# Altium PCB Grabber_DIOT.PCBDOC (part 2 of 7)
Units mm, origin at the board's own origin, x right, y up, seen from the top; angles counter-clockwise.
Board outline 222.9 x 100 mm, 4 copper layers (L1, P2, P3, L4), stack 1.6 mm thick; 235 components, 180 nets, 1032 pads, 664 vias.
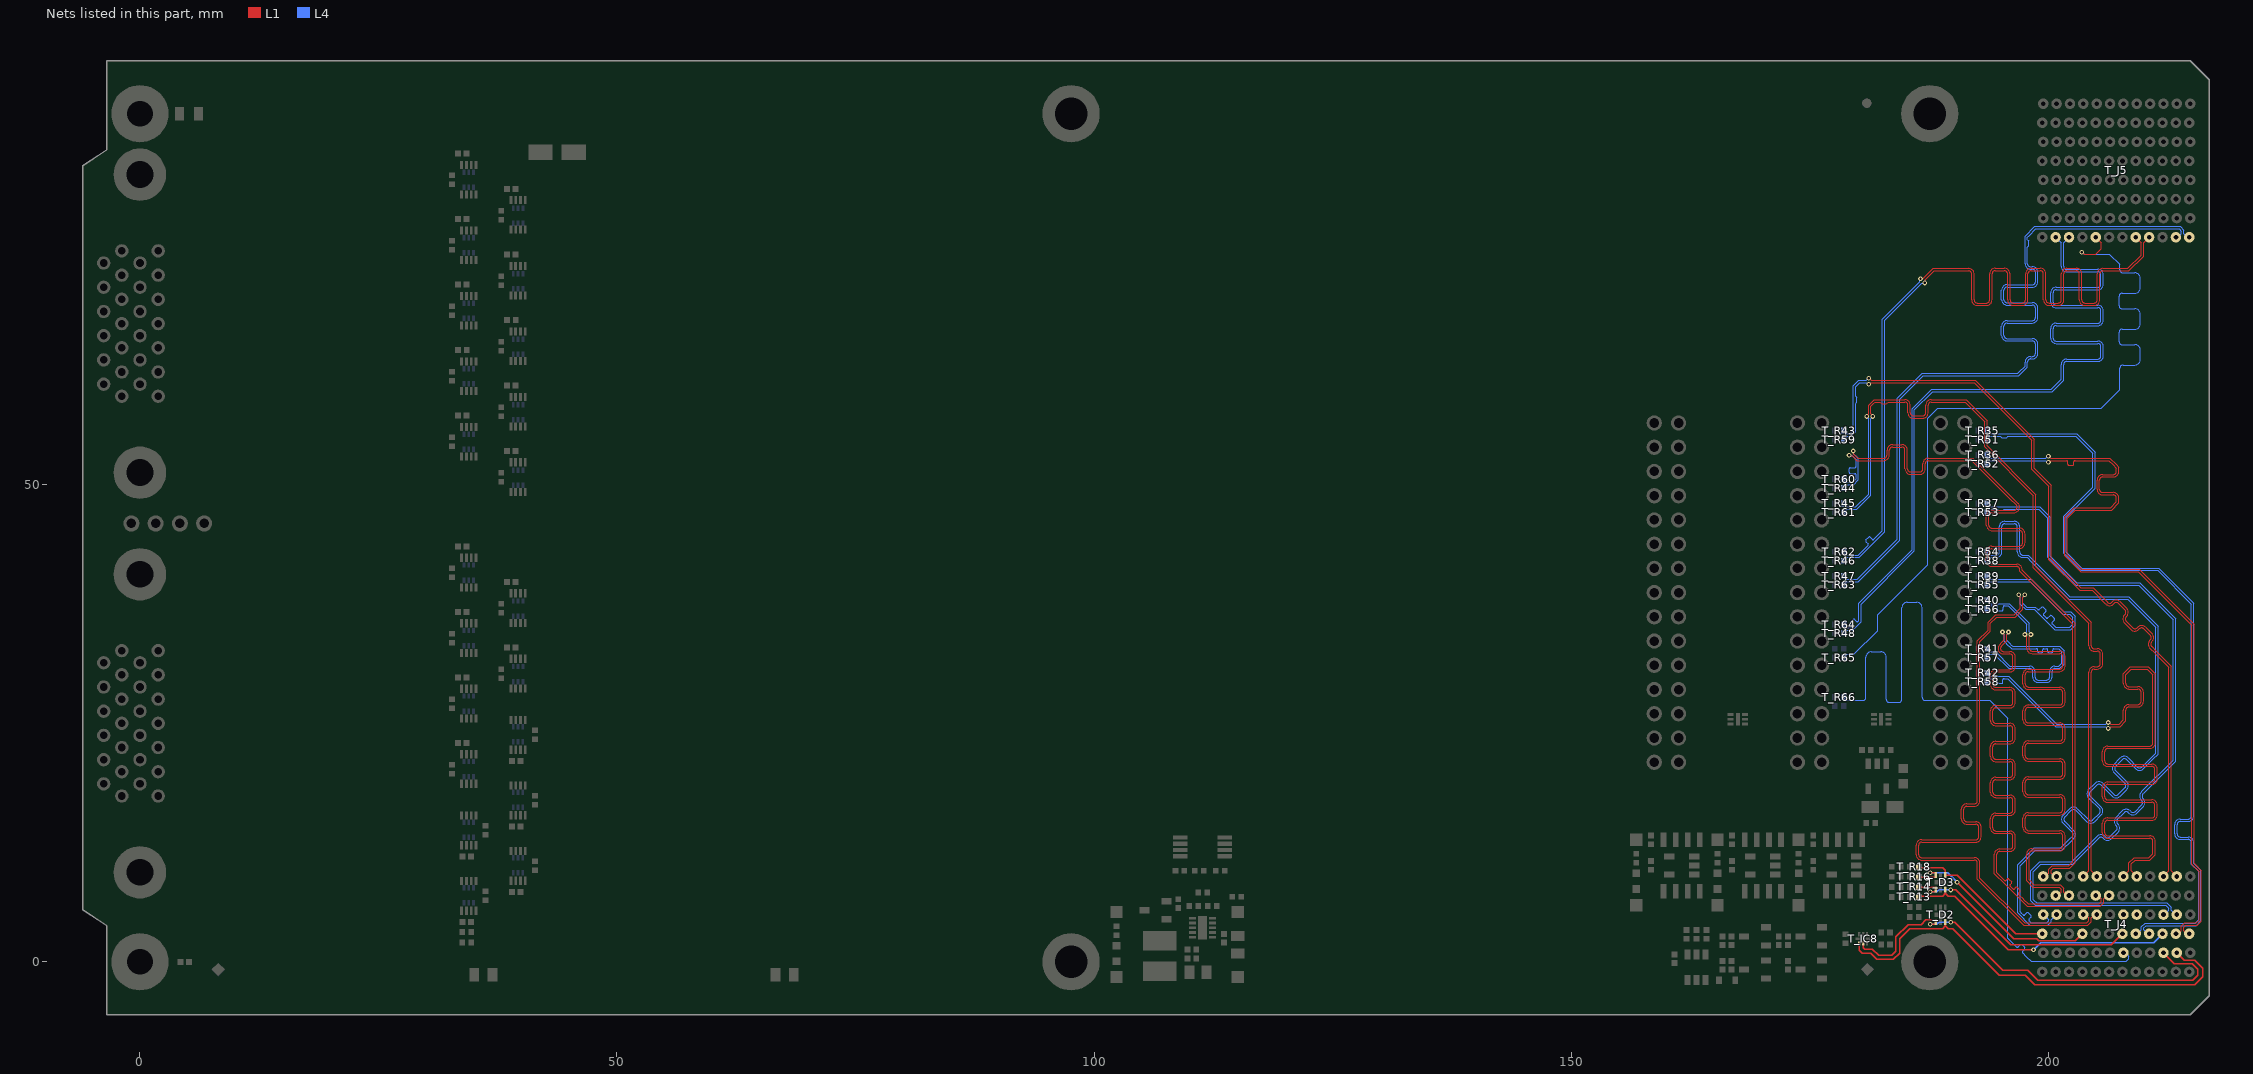
[diagram p4: the nets of this part, all layers, seen from the top]

## Part data
C47A C47B C47C C47D C47E C47F C47G C47H C47I C47J C47K C47L C47M C47N C47O C47P C47Q C47R C47S C47T C47U C59 C65 C67 T_C3 T_C4 T_C5 T_C6 T_C7 T_C8 T_C9 T_C14 T_C15 T_C20 T_C21 T_C22 T_C23: library part CC0402_100NF_50V_10%_X7R, "Non-polarised capacitor", Case=0402, Manufacturer=GENERIC, Manufacturer1 ComponentHeight=0.55mm, Manufacturer1 Example=MURATA, Manufacturer1 Part Number=GRM155R71H104KE14D, Tolerance=±10%, Voltage=50V, Author="CERN DEM MR", Component Type=Standard, CreateDate=30.06.2017, HelpURL=\\cern.ch\dfs\Applications\Altium\Datasheets\CC0402_MURATA_GRM155R71H104KE14D.pdf, LatestRevisionDate=30.06.2017, Manufacturer Part Number=CC0402_100NF_50V_10%_X7R, Mounted=Yes, Part Description="SMD Multilayer Chip Ceramic Capacitor", Part Number=CC0402_100NF_50V_10%_X7R, Pin Count=2, Sense=No, SMD=Yes, Socket=No, Status=None, TC=X7R
C62: library part CAE430-540_10UF_16V_20%, "Polarised capacitor", Case=B, Manufacturer=PANASONIC, Manufacturer Part Number=EEEFK1C100AR, Tolerance=±20%, Voltage=16V, Author="CERN DEM JLC", ComponentHeight=5.8mm, Component Type=Standard, CreateDate=03.12.2007, HelpURL=\\cern.ch\dfs\Applications\Altium\Datasheets\CAE_PANASONIC_FK.pdf, LatestRevisionDate=05.11.2014, Mounted=Yes, Part Description="Aluminum Electrolytic SMT Capacitor", Part Number=CAE430-540_10UF_16V_20%, Pin Count=2, Sense=No, SMD=Yes, Socket=No, Status="Not Recommended"
C66 C68: library part CC0805_22UF_16V_10%_X5R, "Non-polarised capacitor", Case=0805, Manufacturer=GENERIC, Manufacturer1 ComponentHeight=1.35mm, Manufacturer1 Example=TDK, Manufacturer1 Part Number=C2012X5R1C226KT, Tolerance=±10%, Voltage=16V, Author="CERN DEM JLC", Component Type=Standard, CreateDate=25.10.2012, HelpURL=\\cern.ch\dfs\Applications\Altium\Datasheets\CC0805_X5R_TDK_C.pdf, LatestRevisionDate=25.10.2012, Manufacturer Part Number=CC0805_22UF_16V_10%_X5R, Mounted=Yes, Part Description="SMD Multilayer Chip Ceramic Capacitor", Part Number=CC0805_22UF_16V_10%_X5R, Pin Count=2, Sense=No, SMD=Yes, Socket=No, Status=Preferred, TC=X5R
D1A D1B D1C D1D D1E D1F D1G D1H D1I D1J D1K D1L D1M D1N D1O D1P D1Q D1R D1S D1T D1U: "ESD Protection Diodes Array (8kV) with Low Clamping Voltage", Manufacturer="ON SEMICONDUCTOR", Voltage=5.5V, Author="CERN DEM JLC", Bonding=No, ComponentHeight=1.75mm, Component Type=Standard, CreateDate=05.12.2012, Device=NUP4114UPXV6T1G, HelpURL=\\cern.ch\dfs\Applications\Altium\Datasheets\NUP4114UPXV6T1G.pdf, LatestRevisionDate=05.12.2012, Manufacturer Part Number=NUP4114UPXV6T1G, Mounted=Yes, PackageDescription="SOTFL (SOT666, SOT563,), 0.50mm, Pitch; 6 Pin, 1.20mm W X 1.60mm L X 0.60mm H Body, IPC Medium Density", Part Description="ESD Protection Diodes Array (8kV) with Low Clamping Voltage", Part Number=NUP4114UPXV6T1G, Pin Count=8, PressFit=No, Sense=No, SMD=Yes, Socket=No
FTG1 FTG4: library part FIDUCIAL_TARGET_C100-200, "Fiducial Target", Author="CERN DEM JLC", Component Type="Standard (No BOM)", ComponentHeight=0mm, CreateDate=09.02.2010, Family=Fiducial, HelpURL=Undefined, LatestRevisionDate=04.04.2012, Mounted=No, PackageDescription="Round Fiducial Target, Top Layer, 1.0mm, Top Solder 2.0mm, Keepout =2.0mm", Part Description="Round Fiducial Target, Top Layer, 1.0mm, Top Solder 2.0mm, Keepout =2.0mm", Part Number=FIDUCIAL_TARGET_C100-200, Pin Count=1, Sense=No, SMD=Yes, Socket=No, Status=None
FTG2 FTG3 FTG5 FTG6: library part FIDUCIAL_TARGET_S100-200, "Fiducial Target", Author="CERN DEM JLC", Component Type="Standard (No BOM)", ComponentHeight=0mm, CreateDate=09.02.2010, Family=Fiducial, HelpURL=Undefined, LatestRevisionDate=04.04.2012, Mounted=No, PackageDescription="Square Fiducial Target, Top Layer, 1.0mm, Top Solder 2.0mm, Keepout =2.0mm", Part Description="Square Fiducial Target, Top Layer, 1.0mm, Top Solder 2.0mm, Keepout =2.0mm", Part Number=FIDUCIAL_TARGET_S100-200, Pin Count=1, Sense=No, SMD=Yes, Socket=No, Status=None
IC20A IC20B IC20C IC20D IC20E IC20F IC20G IC20H IC20I IC20J IC20K IC20L IC20M IC20N IC20O IC20P IC20Q IC20R IC20S IC20T IC20U: "LVDS Single Port High Speed Repeater", Case=TSSOP8, Manufacturer="FAIRCHILD SEMICONDUCTOR", Author="CERN DEM JLC", Bonding=No, ComponentHeight=0.8mm, Component Type=Standard, CreateDate=08.11.2016, Device=FIN1101K8X, HelpURL=\\cern.ch\dfs\Applications\Altium\Datasheets\FIN1101K8X.pdf, LatestRevisionDate=08.11.2016, Manufacturer Part Number=FIN1101K8X, Mounted=Yes, PackageDescription="SOP, 0.50mm Pitch; 8 pin, 2.30mm W X 2.00mm L X 0.90mm H body, PC Medium Density", Part Description="LVDS Single Port High Speed Repeater", Part Number=FIN1101K8X, Pin Count=8, PressFit=No, Sense=No, SMD=Yes, Socket=No
IC27: "4.75-28VDC to 1-6VDC, 500mA Step-Down Converter With Sleep Mode", Case=SON10, Manufacturer="TEXAS INSTRUMENTS", Author="CERN DEM JMW", Bonding=No, ComponentHeight=0.8mm, Component Type=Standard, CreateDate=11.08.2015, Device=TPS62175DQC, HelpURL=\\cern.ch\dfs\Applications\Altium\Datasheets\TPS62175DQC.pdf, LatestRevisionDate=11.08.2015, Manufacturer Part Number=TPS62175DQC, Mounted=Yes, PackageDescription="SON, 10-Leads, Body 2x3mm, Pitch 0.5mm, Thermal Pad 0.94x2.5mm, IPC Medium Density", Part Description="4.75-28VDC to 1-6VDC, 500mA Step-Down Converter With Sleep Mode", Part Number=TPS62175DQC, Pin Count=11, PressFit=No, Sense=No, SMD=Yes, Socket=No
J1 J2: library part 3M_N10226-5212PC, "Connector Mini D Ribbon (MDR) 26 Female", Manufacturer=3M, Author="CERN DEM JLC", Component Type=Standard, ComponentHeight=9.4mm, CreateDate=18.11.2008, Family="MDR 26", HelpURL=\\cern.ch\dfs\Applications\Altium\Datasheets\3M_N10226-5212PC.pdf, LatestRevisionDate=14.10.2009, Manufacturer Part Number=N10226-5212PC, Mounted=Yes, Part Description="26 contacts, Mini D Ribbon (MDR), .050\" Boardmount Through-hole Right Angle Receptacle-Shielded, Diecast Body, 102 Series", Part Number=N10226-5212PC, Pin Count=28, PressFit=No, Sense=No, SMD=No, Socket=No, Status=None
L2: library part IND_10UH_10%_MURATA-PS_8400, "Inductor With Core", Manufacturer="MURATA POWER SOLUTIONS", Manufacturer Part Number=84103C, Power=950mA, Resistance=0.24R, Tolerance=±10%, Author="CERN DEM JLC", ComponentHeight=2.9mm, Component Type=Standard, CreateDate=02.07.2012, HelpURL=\\cern.ch\dfs\Applications\Altium\Datasheets\IND_MURATA-PS_8400.pdf, LatestRevisionDate=02.07.2012, Mounted=Yes, Part Description="Miniature Surface Mount Power Inductor (8400 Serie)", Part Number=IND_10UH_10%_MURATA-PS_8400, Pin Count=2, Sense=No, SMD=Yes, Socket=No, Status=None
R1 T_R3 T_R7 T_R8 T_R31 T_R32 T_R33 T_R34: library part R0402_10K_1%_0.0625W_100PPM, "Resistor - 1%", Case=0402, Manufacturer=GENERIC, Manufacturer1 ComponentHeight=0.4mm, Manufacturer1 Example="YAGEO PHYCOMP", Manufacturer1 Part Number=232270671003L, Power=0.0625W, Tolerance=±1%, Author="CERN DEM JLC", Component Type=Standard, CreateDate=03.12.2007, HelpURL=\\cern.ch\dfs\Applications\Altium\Datasheets\R0402_Phycomp_RC0402.pdf, LatestRevisionDate=17.10.2012, Manufacturer Part Number=R0402_10K_1%_0.0625W_100PPM, Mounted=Yes, Part Description="General Purpose Thick Film Chip Resistor", Part Number=R0402_10K_1%_0.0625W_100PPM, Pin Count=2, PressFit=No, Sense=No, SMD=Yes, Socket=No, Status="Not Recommended", TC=±100ppm/°C
R8 R9 R131A R131B R131C R131D R131E R131F R131G R131H R131I R131J R131K R131L R131M R131N R131O R131P R131Q R131R R131S R131T R131U: library part R0402_100R_1%_0.1W_100PPM, "Resistor - 1%", Case=0402, Manufacturer=GENERIC, Manufacturer1 ComponentHeight=0.4mm, Manufacturer1 Example=PANASONIC, Manufacturer1 Part Number=ERJ2RKF1000X, Manufacturer Part Number=R0402_100R_1%_0.1W_100PPM_50V, Power=0.1W, Tolerance=±1%, Voltage=50V, Author="CERN DEM JLC", Component Type=Standard, CreateDate=12.12.2013, HelpURL=\\cern.ch\dfs\Applications\Altium\Datasheets\R0402_PANASONIC_ERJ2RK.pdf, LatestRevisionDate=03.03.2015, Mounted=Yes, Part Description="General Purpose Thick Film Chip Resistor", Part Number=R0402_100R_1%_0.1W_100PPM, Pin Count=2, Sense=No, SMD=Yes, Socket=No, Status="Not recommended", TC=±100ppm/°C
R121: library part R0402_75K_1%_0.0625W_100PPM, "Resistor - 1%", Case=0402, Manufacturer=GENERIC, Manufacturer1 ComponentHeight=0.4mm, Manufacturer1 Example="YAGEO PHYCOMP", Manufacturer1 Part Number=232270677503L, Power=0.0625W, Tolerance=±1%, Author="CERN DEM JLC", Component Type=Standard, CreateDate=03/12/2007, HelpURL=\\cern.ch\dfs\Applications\Altium\Datasheets\R0402_Phycomp_RC0402.pdf, LatestRevisionDate=17/10/2012, Manufacturer Part Number=R0402_75K_1%_0.0625W_100PPM, Mounted=Yes, Part Description="General Purpose Thick Film Chip Resistor", Part Number=R0402_75K_1%_0.0625W_100PPM, Pin Count=2, PressFit=No, Sense=No, SMD=Yes, Socket=No, Status="Not Recommended", TC=±100ppm/°C
R122: library part R0402_24K_1%_0.0625W_100PPM, "Resistor - 1%", Case=0402, Manufacturer=GENERIC, Manufacturer1 ComponentHeight=0.4mm, Manufacturer1 Example="YAGEO PHYCOMP", Manufacturer1 Part Number=232270672403L, Power=0.0625W, Tolerance=±1%, Author="CERN DEM JLC", Component Type=Standard, CreateDate=03/12/2007, HelpURL=\\cern.ch\dfs\Applications\Altium\Datasheets\R0402_Phycomp_RC0402.pdf, LatestRevisionDate=17/10/2012, Manufacturer Part Number=R0402_24K_1%_0.0625W_100PPM, Mounted=Yes, Part Description="General Purpose Thick Film Chip Resistor", Part Number=R0402_24K_1%_0.0625W_100PPM, Pin Count=2, PressFit=No, Sense=No, SMD=Yes, Socket=No, Status="Not Recommended", TC=±100ppm/°C
SCREW1 SCREW2 SCREW3 SCREW4: library part MECH_MDR_screw_lock, "VHDCI Female Screw Lock", Manufacturer=3M, Author=GK, Component Type=Mechanical, ComponentHeight=5.48mm, CreateDate=10.09.2013, HelpURL=\\cern.ch\dfs\Applications\Altium\Datasheets\TYCO_749087-2.pdf, LatestRevisionDate=10.09.2013, Manufacturer Part Number=3341-31, Mounted=Yes, PackageDescription="MDR Female Screw Locks, Thread Size: M2.5", Part Description="MDR Female Screw Locks, Thread Size: M2.5", Part Number=3341-31, Pin Count=0, PressFit=No, Sense=No, SMD=No, Socket=No, Status=None
T_B7 T_B8: library part PLATED_HOLE2.7_PAD6.0, "Single Terminal Socket", Author="CERN DEM HF", Component Type="Standard (No BOM)", ComponentHeight=0mm, CreateDate=28.08.2024, Family="Plated Hole", HelpURL=Undefined, LatestRevisionDate=28.08.2024, Mounted=No, PackageDescription="Plated Through Hole: Hole Dia.=2.7mm Pad Dia.=6.0mm", Part Description="Plated Through Hole: Hole Dia.=2.7mm Pad Dia.=6.0mm", Part Number=PLATED_HOLE2.7_PAD6.0, Pin Count=1, Sense=No, SMD=No, Socket=No, Status=None
T_C1: library part CC0603_1UF_25V_10%_X7R, "Non-polarised capacitor", Case=0603, Manufacturer=GENERIC, Manufacturer1 ComponentHeight=0.9mm, Manufacturer1 Example=MURATA, Manufacturer1 Part Number=GRM188R71E105KA12D, Tolerance=±10%, Voltage=25V, Author="CERN DEM JLC", Component Type=Standard, CreateDate=18.01.2011, HelpURL=\\cern.ch\dfs\Applications\Altium\Datasheets\CC0603_X7R_MURATA.pdf, LatestRevisionDate=18.01.2011, Manufacturer Part Number=CC0603_1UF_25V_10%_X7R, Mounted=Yes, Part Description="SMD Multilayer Chip Ceramic Capacitor", Part Number=CC0603_1UF_25V_10%_X7R, Pin Count=2, Sense=No, SMD=Yes, Socket=No, Status=None, TC=X7R
T_C2: library part CTE3216-18_4.7UF_10V_10%_AVX_TPSA475K010T1400, "Polarised capacitor", Case=A, Manufacturer=AVX, Manufacturer Part Number=TPSA475K010T1400, Tolerance=±10%, Voltage=10V, Author="CERN DEM JLC", Component Type=Standard, ComponentHeight=1.8mm, CreateDate=23.01.2018, HelpURL=\\cern.ch\dfs\Applications\Altium\Datasheets\CTE-LESR_AVX_TPS-AUTO.pdf, LatestRevisionDate=23.01.2018, Mounted=Yes, Part Description="Low ESR 1R4 Automotive Solid Tantalum Chip Capacitor", Part Number=CTE3216-18_4.7UF_10V_10%_AVX_TPSA475K010T1400, Pin Count=2, Sense=No, SMD=Yes, Socket=No, Status=Preferred
T_C12: library part CC0402_22PF_50V_5%_C0G, "Non-polarised capacitor", Case=0402, Manufacturer=GENERIC, Manufacturer1 ComponentHeight=0.55mm, Manufacturer1 Example=KEMET, Manufacturer1 Part Number=C0402C220J5GACTU, Tolerance=±5%, Voltage=50V, Author="CERN DEM JLC", Component Type=Standard, CreateDate=2007-12-03, HelpURL="\\cern.ch\dfs\Applications\Altium\Datasheets\CC0402_C0G_KEMET_(Commercial Grade).pdf", LatestRevisionDate=2007-12-03, Manufacturer Part Number=CC0402_22PF_50V_5%_C0G, Mounted=Yes, Part Description="SMD Multilayer Chip Ceramic Capacitor", Part Number=CC0402_22PF_50V_5%_C0G, Pin Count=2, Sense=No, SMD=Yes, Socket=No, Status=Preferred, TC=C0G/NP0
T_C13 T_C16 T_C17 T_C18 T_C19: library part CC0402_10NF_50V_5%_X7R, "Non-polarised capacitor", Case=0402, Manufacturer=GENERIC, Manufacturer1 ComponentHeight=0.55mm, Manufacturer1 Example=KEMET, Manufacturer1 Part Number=C0402C103J5RAC, Tolerance=±5%, Voltage=50V, Author="CERN DEM BC", Component Type=Standard, CreateDate=15.07.2020, HelpURL=\\cern.ch\dfs\Applications\Altium\Datasheets\CC0402_X7R_KEMET.pdf, LatestRevisionDate=15.07.2020, Manufacturer Part Number=CC0402_10NF_50V_5%_X7R, Mounted=Yes, Part Description="SMD Multilayer Chip Ceramic Capacitor", Part Number=CC0402_10NF_50V_5%_X7R, Pin Count=2, Sense=No, SMD=Yes, Socket=No, Status=Preferred, TC=X7R
T_D1 T_D2 T_D3 T_D4: library part CMP-004-00037-2, "Diode TVS Quint Common Anode Uni-Dir 3.3V 40W 6-Pin SLP EP T/R", Max Operating Temperature=125°C, Min Operating Temperature=-55°C, Mounting Technology="Surface Mount", Pins=6
T_D6: "Schottky Diode", Case=SOD-523F, Manufacturer=COMCHIP, Power=500mA, Voltage=20V, Author="CERN DEM HF", Bonding=No, Component Type=Standard, ComponentHeight=1mm, CreateDate=13.10.2023, Device=CDBU0520-HF, HelpURL=\\cern.ch\dfs\Applications\Altium\Datasheets\CDBU0520-HF.pdf, LatestRevisionDate=13.10.2023, Manufacturer Part Number=CDBU0520-HF, Mounted=Yes, PackageDescription="Small Outline Diode Flat Lead (SOD-523F), Body; 1.80mm L X 1mm W X 0.85mm H", Part Description="20V Surface mount Schottky Barrier Diode", Part Number=CDBU0520-HF, Pin Count=2, PressFit=No, Sense=No, SMD=Yes, Socket=No
T_IC1: "500mA Peak Output LDO Regulator", Case=SOT23-5, Manufacturer="MICROCHIP TECHNOLOGY", Author="CERN DEM WB", Bonding=No, Component Type=Standard, ComponentHeight=1.45mm, CreateDate=2019-04-16, Device=MIC5219-3.3YM5, HelpURL=\\cern.ch\dfs\Applications\Altium\Datasheets\MIC5219-3.3YM5.pdf, LatestRevisionDate=2019-04-16, Manufacturer Part Number=MIC5219-3.3YM5, Mounted=Yes, PackageDescription="SOT, 0.95mm pitch; 5 pin, 1.60mm W X 2.90mm L X 1.45mm H body, IPC Medium Density", Part Description="3.3V 500mA Peak Output Low Drop-Out  (LDO) Regulator", Part Number=MIC5219-3.3YM5, Pin Count=5, PressFit=No, Sense=No, SMD=Yes, Socket=No
T_IC2 T_IC4 T_IC9: "1.7V-5.5V, 2K I2C Serial EEPROM With EUI-48 Node Identity", Case=SOT23-5, Manufacturer="MICROCHIP TECHNOLOGY", Author="CERN DEM MR", Bonding=No, Component Type=Standard, ComponentHeight=1.45mm, CreateDate=31.03.2016, Device=24AA02E48T-I/OT, HelpURL=\\cern.ch\dfs\Applications\Altium\Datasheets\24AA02E48T-I-OT.pdf, LatestRevisionDate=31.03.2016, Manufacturer Part Number=24AA02E48T-I/OT, Mounted=Yes, PackageDescription="SOT, 0.95mm pitch; 5 pin, 1.60mm W X 2.90mm L X 1.45mm H body, IPC Medium Density", Part Description="1.7V-5.5V, 2K I2C Serial EEPROM with EUI-48 Node Identity", Part Number=24AA02E48T-I/OT, Pin Count=5, PressFit=No, Sense=No, SMD=Yes, Socket=No
T_IC3 T_IC5 T_IC10: "1.7V-5.5V, 2K I2C™ Serial EEPROMs with EUI-48™ Node Identity", Case=SOIC8, Manufacturer="MICROCHIP TECHNOLOGY", Author="CERN DEM MR", Bonding=No, Component Type=Standard, ComponentHeight=1.75mm, CreateDate=19.07.2016, Device=24AA025E48-I/SN, HelpURL=\\cern.ch\dfs\Applications\Altium\Datasheets\24AA025E48-I-SN.pdf, LatestRevisionDate=19.07.2016, Manufacturer Part Number=24AA025E48-I/SN, Mounted=Yes, PackageDescription="SOIC 8, Pitch 1.27mm - Body 4x5mm, IPC Medium Density", Part Description="1.7V-5.5V, 2K I2C™ Serial EEPROMs with EUI-48™ Node Identity", Part Number=24AA025E48-I/SN, Pin Count=8, PressFit=No, Sense=No, SMD=Yes, Socket=No
T_IC6: library part CMP-010-00652-2, "Serial Switch/Digital Sensor, 9 Bit(s), 3Cel, Square, 8 Pin, Surface Mount", Max Operating Temperature=125°C, Max Supply Voltage=5.5V, Min Operating Temperature=-55°C, Min Supply Voltage=2.7V, Mounting Technology="Surface Mount", Pins=8, RoHS Compliant=Yes, Sensor Type="TEMPERATURE SENSOR,SWITCH/DIGITAL OUTPUT,SERIAL"
T_IC7: "Low Quiescent Current, Programmable-Delay Supervisory Circuit", Case=SOT23-6, Manufacturer="TEXAS INSTRUMENTS", Manufacturer Part Number=TPS3808G01DBV, Author="CERN DEM JLC", Bonding=No, Component Type=Standard, ComponentHeight=1.45mm, CreateDate=22.10.2008, Device=TPS3808G01DBVT, HelpURL=\\cern.ch\dfs\Applications\Altium\Datasheets\TPS3808G01DBVT.pdf, LatestRevisionDate=10.06.2022, Mounted=Yes, PackageDescription="SOT, 0.95mm Pitch; 6 Pin, 1.60mm W X 2.90mm L X 1.45mm H body, IPC Medium Density", Part Description="Adjustable Low Quiescent Current, Programmable-Delay Supervisory Circuit", Part Number=TPS3808G01DBVT, Pin Count=6, PressFit=No, Sense=No, SMD=Yes, Socket=No
T_IC8: library part CMP-015-00014-1, "Dual Supply 2-Bit Voltage Translator/Buffer/Repeater Isolator for I2C Applications", Manufacturer=Onsemi, Max Operating Temperature=85°C, Max Supply Voltage=5.5V, Min Operating Temperature=-40°C, Min Supply Voltage=1.65V, Manufacaturer Part Number=FXMA2102UMX, Mounting Technology="Surface Mount", Pins=8
T_J1 T_J2 T_J3: library part 3M_N2530-6002RB, "Connector 30 Male", Manufacturer=3M, Manufacturer Part Number=N2530-6002RB, Author="CERN DEM JLC", ComponentHeight=10.03mm, Component Type=Standard, CreateDate=11.02.2009, Family="Header 30", HelpURL=\\cern.ch\dfs\Applications\Altium\Datasheets\3M_N2530-6002RB.pdf, LatestRevisionDate=11.08.2009, Mounted=Yes, Part Description="30 Contacts - Straight .100'' x .100'' Low Profile Four-Wall Header, 2500 Series", Part Number=3M_N2530-6002RB, Pin Count=30, PressFit=No, Sense=No, SMD=No, Socket=No, Status=None
T_J4: library part AMPHENOL_10052825-101LF, "72 Contacts Header, 6 Columns, 4 Pairs per Column", Manufacturer=AMPHENOL, Manufacturer Part Number=10052825-101LF, Author="CERN DEM MR", ClassName=Overlapping, Component Type=Standard, ComponentHeight=15.35mm, ComponentLink1Description=Application, ComponentLink1URL=\\cern.ch\dfs\Applications\Altium\Datasheets\AMPHENOL_10052825-101LF_Application.pdf, CreateDate=19/02/2018, Family="AirMax VS", HelpURL=\\cern.ch\dfs\Applications\Altium\Datasheets\AMPHENOL_10052825-101LF.pdf, LatestRevisionDate=19/02/2018, Mounted=Yes, Part Description="72 Contacts, 2mm Pitch, 6 Columns, 4 Pairs per Column, 4 Walls, Right Angle Header", Part Number=AMPHENOL_10052825-101LF, Pin Count=72, PressFit=Yes, Sense=No, SMD=No, Socket=No, Status=None
T_J5: library part AMPHENOL_10052838-101LF, "96 Contacts Header, 8 Columns, 4 Pairs per Column", Manufacturer=AMPHENOL, Manufacturer Part Number=10052838-101LF, Author="CERN DEM MR", Component Type=Standard, ComponentHeight=15.35mm, ComponentLink1Description=Application, ComponentLink1URL=\\cern.ch\dfs\Applications\Altium\Datasheets\AMPHENOL_10052838-101LF_Application.pdf, CreateDate=19.02.2018, Family="AirMax VS", HelpURL=\\cern.ch\dfs\Applications\Altium\Datasheets\AMPHENOL_10052838-101LF.pdf, LatestRevisionDate=19.02.2018, Mounted=Yes, Part Description="96 Contacts, 2mm Pitch, 8 Columns, 4 Pairs per Column, 4 Walls, Right Angle Header", Part Number=AMPHENOL_10052838-101LF, Pin Count=96, PressFit=Yes, Sense=No, SMD=No, Socket=No, Status=None
T_LD1: library part LED_DIALIGHT_571-0112F, "2x LED  Botom Green, Top Red", Manufacturer=DIALIGHT, Manufacturer Part Number=571-0112F, Author="CERN DEM JLC", Bonding=No, Color=Red/Green, ComponentHeight=8.6mm, Component Type=Standard, CreateDate=09.11.2009, HelpURL=\\cern.ch\dfs\Applications\Altium\Datasheets\LED_DIALIGHT_571-0112F.pdf, LatestRevisionDate=17.03.2010, Mounted=Yes, PackageDescription="2x 2mm LED (Top: Red, Bot: Green) PCB Edge Mounting (Without positioning pins) DIALIGHT 571 Serie", Part Description="Dual 2mm  LEDs, Red Top,Green Bot, CBI® Circuit Board Indicator (Without positioning pins)", Part Number=LED_DIALIGHT_571-0112F, Pin Count=4, PressFit=No, Sense=No, SMD=No, Socket=No
T_LD3 T_LD4 T_LD5 T_LD6: library part LED_KINGBRIGHT_KPH-1608CGCK, "LED Green 1C 2A", Manufacturer=KINGBRIGHT, Manufacturer Part Number=KPH-1608CGCK, Author="CERN DEM JLC", Bonding=No, Color=Green, Component Type=Standard, ComponentHeight=0.65mm, CreateDate=03.07.2017, HelpURL=\\cern.ch\dfs\Applications\Altium\Datasheets\LED_KINGBRIGHT_KPH-1608CGCK.pdf, LatestRevisionDate=03.07.2017, Mounted=Yes, PackageDescription="SMT Green LED, Case 0603, Body L 1.6 x W 0.8mm H 0.65mm", Part Description="SMD Green LED, Case 1.6mmX0.8mm(0603), 0.65mm Thickness", Part Number=LED_KINGBRIGHT_KPH-1608CGCK, Pin Count=2, PressFit=No, Sense=No, SMD=Yes, Socket=No
T_M1 T_M2 T_M3 T_M4: library part CMP-00028-00019-2, "PTH  Hole 3.4, 6mm pad", Pins=1
T_R1 T_R5 T_R6 T_R9 T_R10: library part R0402_1K6_1%_0.0625W_100PPM, "Resistor - 1%", Case=0402, Manufacturer=GENERIC, Manufacturer1 ComponentHeight=0.4mm, Manufacturer1 Example="YAGEO PHYCOMP", Manufacturer1 Part Number=232270671602L, Power=0.0625W, Tolerance=±1%, Author="CERN DEM JLC", Component Type=Standard, CreateDate=03.12.2007, HelpURL=\\cern.ch\dfs\Applications\Altium\Datasheets\R0402_Phycomp_RC0402.pdf, LatestRevisionDate=17.10.2012, Manufacturer Part Number=R0402_1K6_1%_0.0625W_100PPM, Mounted=Yes, Part Description="General Purpose Thick Film Chip Resistor", Part Number=R0402_1K6_1%_0.0625W_100PPM, Pin Count=2, PressFit=No, Sense=No, SMD=Yes, Socket=No, Status="Not Recommended", TC=±100ppm/°C
T_R2 T_R4 T_R25 T_R35 T_R36 T_R37 T_R38 T_R39 T_R40 T_R41 T_R42 T_R43 T_R44 T_R45 T_R46 T_R47 T_R48 T_R49 T_R50 T_R51 T_R52 T_R53 T_R54 T_R55 T_R56 T_R57 T_R58 T_R59 T_R60 T_R61 T_R62 T_R63 T_R64 T_R65 T_R66: library part R0402_0R_JUMPER, "Resistor", Case=0402, Manufacturer=GENERIC, Manufacturer1 ComponentHeight=0.4mm, Manufacturer1 Example="YAGEO PHYCOMP", Manufacturer1 Part Number=232270591001L, Author="CERN DEM JLC", Component Type=Standard, CreateDate=03.12.2007, HelpURL=\\cern.ch\dfs\Applications\Altium\Datasheets\R0402_Phycomp_RC0402.pdf, LatestRevisionDate=17.10.2012, Manufacturer Part Number=R0402_0R_JUMPER, Mounted=Yes, Part Description="1A (0.05R Max DC Resistance) Zero Ohm Jumper", Part Number=R0402_0R_JUMPER, Pin Count=2, Sense=No, SMD=Yes, Socket=No
  T_R2 T_R4 T_R35 T_R36 T_R37 T_R38 T_R39 T_R40 T_R41 T_R42 T_R43 T_R44 T_R45 T_R46 T_R47 T_R48 T_R49 T_R50 T_R51 T_R52 T_R53 T_R54 T_R55 T_R56 T_R57 T_R58 T_R59 T_R60 T_R61 T_R62 T_R63 T_R64 T_R65 T_R66: PressFit=No, Status="Not Recommended"
  T_R25: Status="Not recommended"
T_R13 T_R14 T_R15 T_R16 T_R17 T_R18: library part R0402_22R_1%_0.0625W_100PPM, "Resistor - 1%", Case=0402, Manufacturer=GENERIC, Manufacturer1 ComponentHeight=0.4mm, Manufacturer1 Example="YAGEO PHYCOMP", Manufacturer1 Part Number=232270672209L, Power=0.0625W, Tolerance=±1%, Author="CERN DEM JLC", Component Type=Standard, CreateDate=03.12.2007, HelpURL=\\cern.ch\dfs\Applications\Altium\Datasheets\R0402_Phycomp_RC0402.pdf, LatestRevisionDate=17.10.2012, Manufacturer Part Number=R0402_22R_1%_0.0625W_100PPM, Mounted=Yes, Part Description="General Purpose Thick Film Chip Resistor", Part Number=R0402_22R_1%_0.0625W_100PPM, Pin Count=2, PressFit=No, Sense=No, SMD=Yes, Socket=No, Status="Not Recommended"
T_R19: library part R0402_200R_1%_0.0625W_100PPM, "Resistor - 1%", Case=0402, Manufacturer=GENERIC, Manufacturer1 ComponentHeight=0.4mm, Manufacturer1 Example="YAGEO PHYCOMP", Manufacturer1 Part Number=232270672001L, Power=0.0625W, Tolerance=±1%, Author="CERN DEM JLC", Component Type=Standard, CreateDate=2007-12-03, HelpURL=\\cern.ch\dfs\Applications\Altium\Datasheets\R0402_Phycomp_RC0402.pdf, LatestRevisionDate=2012-10-17, Manufacturer Part Number=R0402_200R_1%_0.0625W_100PPM, Mounted=Yes, Part Description="General Purpose Thick Film Chip Resistor", Part Number=R0402_200R_1%_0.0625W_100PPM, Pin Count=2, PressFit=No, Sense=No, SMD=Yes, Socket=No, Status="Not Recommended", TC=±100ppm/°C
T_R26: library part R0805_1M1_1%_0.125W_100PPM, "Resistor - 1%", Case=0805, Manufacturer=GENERIC, Manufacturer1 ComponentHeight=0.6mm, Manufacturer1 Example="NIC COMPONENT", Manufacturer1 Part Number=NRC10F1104TRF, Author="CERN DEM JLC", Component Type=Standard, CreateDate=03/12/2007, HelpURL=\\cern.ch\dfs\Applications\Altium\Datasheets\R0805_NIC_NRC.pdf, LatestRevisionDate=13/03/2008, Manufacturer Part Number=R0805_1M1_1%_0.125W_100PPM, Mounted=Yes, Part Description="General Purpose Thick Film Chip Resistor", Part Number=R0805_1M1_1%_0.125W_100PPM, Pin Count=2, PressFit=No, Sense=No, SMD=Yes, Socket=No, Status=Preferred
T_R27 T_R28: library part "R0805_10M_1%_0.125W_100PPM_VISHAY_CRCW e3", "Resistor - 1%", Case=0805, Manufacturer="VISHAY DALE", Manufacturer Part Number=CRCW080510M0FKEA, Power=0.125W, Tolerance=±1%, Author="CERN DEM BC", Component Type=Standard, ComponentHeight=0.5mm, CreateDate=2019-11-12, HelpURL="\\cern.ch\dfs\Applications\Altium\Datasheets\R0805_VISHAY_CRCW e3.pdf", LatestRevisionDate=2019-11-12, Mounted=Yes, Part Description="150V, Standard Thick Film Chip Resistor", Part Number="R0805_10M_1%_0.125W_100PPM_VISHAY_CRCW e3", Pin Count=2, PressFit=No, Sense=No, SMD=Yes, Socket=No, Status=None, TC=±100ppm/°C
T_R29: library part R0402_100K_1%_0.0625W_100PPM, "Resistor - 1%", Case=0402, Manufacturer=GENERIC, Manufacturer1 ComponentHeight=0.4mm, Manufacturer1 Example="YAGEO PHYCOMP", Manufacturer1 Part Number=232270671004L, Power=0.0625W, Tolerance=±1%, Author="CERN DEM JLC", Component Type=Standard, CreateDate=03.12.2007, HelpURL=\\cern.ch\dfs\Applications\Altium\Datasheets\R0402_Phycomp_RC0402.pdf, LatestRevisionDate=17.10.2012, Manufacturer Part Number=R0402_100K_1%_0.0625W_100PPM, Mounted=Yes, Part Description="General Purpose Thick Film Chip Resistor", Part Number=R0402_100K_1%_0.0625W_100PPM, Pin Count=2, PressFit=No, Sense=No, SMD=Yes, Socket=No, Status="Not Recommended", TC=±100ppm/°C
T_R30: library part R0402_3K9_1%_0.0625W_100PPM, "Resistor - 1%", Case=0402, Manufacturer=GENERIC, Manufacturer1 ComponentHeight=0.4mm, Manufacturer1 Example="YAGEO PHYCOMP", Manufacturer1 Part Number=232270673902L, Power=0.0625W, Tolerance=±1%, Author="CERN DEM JLC", Component Type=Standard, CreateDate=03.12.2007, HelpURL=\\cern.ch\dfs\Applications\Altium\Datasheets\R0402_Phycomp_RC0402.pdf, LatestRevisionDate=17.10.2012, Manufacturer Part Number=R0402_3K9_1%_0.0625W_100PPM, Mounted=Yes, Part Description="General Purpose Thick Film Chip Resistor", Part Number=R0402_3K9_1%_0.0625W_100PPM, Pin Count=2, PressFit=No, Sense=No, SMD=Yes, Socket=No, Status="Not Recommended", TC=±100ppm/°C
T_T1 T_T2 T_T3 T_T4 T_T5: "N-CHANNEL MOSFET WITH DIODE", Case=SOT23-3, Manufacturer="ON SEMICONDUCTOR", Manufacturer Part Number=BSS138L, Author="CERN DEM JLC", Bonding=No, Component Type=Standard, ComponentHeight=1.11mm, CreateDate=23.03.2009, Device=BSS138LT1G, HelpURL=\\cern.ch\dfs\Applications\Altium\Datasheets\BSS138LT1G.pdf, LatestRevisionDate=25.05.2022, Mounted=Yes, PackageDescription="SOT23, 0.95mm Pitch; 3 Pin, 1.40mm W X 3.00mm L X 1.10mm H body, IPC Medium Density", Part Description="50V, 200mA N-Channel Enhancement Mode Field-Effect Transistor", Part Number=BSS138LT1G, Pin Count=3, PressFit=No, Sense=No, SMD=Yes, Socket=No
T_TP1 T_TP2 T_TP3 T_TP4 T_TP5 T_TP6 T_TP7 T_TP8 T_TP9 T_TP10: library part SMD_PAD_1.27X1.27MM, Author="CERN DEM JLC", Component Type="Standard (No BOM)", ComponentHeight=0mm, CreateDate=12.01.2008, Family="Test Point", HelpURL=Undefined, LatestRevisionDate=12.01.2008, Mounted=No, PackageDescription="1.27mm x 1.27mm PCB Copper Area (SMD Test Point)", Part Description="1.27mm x 1.27mm PCB Copper Area (SMD Test Point)", Part Number=SMD_PAD_1.27X1.27MM, Pin Count=1, Sense=No, SMD=Yes, Socket=No, Status=None

## Via types
v1: diameter 0.5, hole 0.25, L1 to L4, tented both sides, 661 vias
v2: diameter 0.5, hole 0.25, L1 to L4, 3 vias

## Nets (pads, with @x,y where several pads share a name; then routed paths per layer and width w, separated by ;. In a path a pad name is that pad's centre, name@x,y a point inside that pad or via, vN(x,y) a via of type N, cw(c..) or ccw(c..) an arc to the next point about the centre after c; other vN are vias at no path point)
BGA0: T_D3.3 T_J4.C3 T_R13.2 | length 29.3
  L1 w0.152: T_R13.2@186.45,6.807 186.519,6.875 188.944,6.875 189.231,7.162 ; T_D3.3@189.231,7.572 189.231,7.162 ; v1(198.48,1.257) 195.829,1.257 190.211,6.875 189.517,6.875 189.231,7.162
  L4 w0.152: v1(198.48,1.257) 199.246,2.023 211.073,2.023 T_J4.C3@212,2.95
BGA1: T_D3.1 T_J4.F3 T_R14.2 | length 25.7
  L1 w0.152: T_R14.2@186.45,7.861 186.508,7.803 188.157,7.803 188.231,7.729 T_D3.1@188.231,7.572 ; v1(187.654,7.334) T_D3.1@188.26,7.334 ; v1(189.807,7.537) 190.335,7.537 196.105,1.767 206.617,1.767 T_J4.F3@207.8,2.95
  L4 w0.152: v1(187.654,7.334) 188.319,7.334 188.522,7.537 v1(189.807,7.537)
BGA2: T_D3.6 T_J4.I3 T_R16.2 | length 21.6
  L1 w0.152: T_R16.2@186.45,8.915 186.503,8.862 T_D3.6@188.157,8.862 ; v1(187.654,9.331) T_D3.6@188.26,9.331 ; v1(190.47,8.332) 196.408,2.394 198.809,2.394 199.011,2.192 202.842,2.192 T_J4.I3@203.6,2.95
  L4 w0.152: v1(187.654,9.331) 189.472,9.331 v1(190.47,8.332)
BGA3: T_D3.4 T_J4.L3 T_R18.2 | length 16.1
  L1 w0.152: T_R18.2@186.45,9.969 186.566,9.853 188.966,9.853 189.231,9.588 T_D3.4@189.231,9.092 190.485,9.092 196.627,2.95 T_J4.L3@199.4,2.95
BP_CLK.CLK_N: T_J4.F4
BP_CLK.CLK_P: T_J4.E4
BP_I2C.SCL: T_D2.3 T_IC8.6 T_J4.B2 | length 47
  L1 w0.152: T_IC8.6@180.231,1.927 180.231,1.211 180.536,0.905 181.407,0.905 182.061,0.251 183.773,0.251 184.436,0.914 184.436,2.415 185.497,3.476 188.944,3.476 189.231,3.763 ; T_D2.3@189.231,4.173 189.231,3.763 ; T_J4.B2@213.5,0.95 214.282,0.168 215.378,0.168 216.203,-0.657 216.203,-1.588 215.391,-2.401 198.631,-2.401 197.616,-1.386 194.866,-1.386 190.004,3.476 189.517,3.476 189.231,3.763
BP_I2C.SDA: T_D2.1 T_IC8.7 T_J4.C2 | length 47.4
  L1 w0.152: T_IC8.7@180.631,1.927 180.631,1.488 180.779,1.339 181.582,1.339 182.239,0.682 183.594,0.682 184.038,1.126 184.038,2.626 185.323,3.911 186.709,3.911 187.202,4.404 188.157,4.404 188.231,4.33 T_D2.1@188.231,4.173 ; v1(187.654,3.935) T_D2.1@188.26,3.935 ; v1(189.807,4.138) 190.226,4.138 195.245,-0.881 197.849,-0.881 198.92,-1.952 215.152,-1.952 215.697,-1.407 215.697,-0.803 215.093,-0.199 213.249,-0.199 T_J4.C2@212.1,0.95
  L4 w0.152: v1(187.654,3.935) 188.319,3.935 188.522,4.138 v1(189.807,4.138)
BP_IO.LVDS_N0: T_J4.E3 T_R51.1 | length 82.9
  L4 w0.127: T_R51.1@193.608,54.741 193.835,54.967 193.835,55.009 193.909,55.083 194.324,55.083 195.014,55.083 195.089,55.009 195.089,54.988 195.152,54.925 195.653,54.925 195.716,54.988 195.716,55.009 195.79,55.083 196.273,55.083 202.928,55.083 204.698,53.312 204.698,49.734 201.667,46.703 201.667,42.801 203.448,41.021 211.487,41.021 215.022,37.486 215.022,16.964 215.022,15.288 cw(c214.697,15.288) 214.697,14.963 213.858,14.963 ccw(c213.858,14.383) 213.278,14.383 213.278,13.407 ccw(c213.858,13.407) 213.858,12.828 214.697,12.828 cw(c214.697,12.502) 215.022,12.502 215.022,12.312 215.022,10.249 215.78,9.491 215.78,4.407 215.419,4.047 210.167,4.047 209.773,3.653 209.773,3.337 209.386,2.95 T_J4.E3@209.2,2.95
BP_IO.LVDS_N1: T_J4.B3 T_R52.1 | length 82.8
  L1 w0.127: v1(200.044,52.358) 200.119,52.358 200.304,52.543 201.259,52.543 201.949,52.543 cw(c201.949,52.416) 202.076,52.416 202.076,52.159 ccw(c202.202,52.159) 202.202,52.033 202.578,52.033 ccw(c202.578,52.159) 202.703,52.159 202.703,52.416 cw(c202.83,52.416) 202.83,52.543 203.29,52.543 206.364,52.543 206.768,52.139 207.169,51.738 207.169,51.402 cw(c206.843,51.402) 206.843,51.076 205.714,51.076 ccw(c205.714,50.497) 205.134,50.497 205.134,49.521 ccw(c205.714,49.521) 205.714,48.941 206.843,48.941 cw(c206.843,48.616) 207.169,48.616 207.169,48.425 207.169,48.214 206.555,47.601 202.763,47.601 201.745,46.583 201.745,42.556 203.405,40.896 209.448,40.896 215.06,35.285 215.06,10.232 215.832,9.459 215.832,4.356 215.558,4.082 214.336,4.082 213.973,3.719 213.973,3.282 213.641,2.95 T_J4.B3@213.4,2.95
  L4 w0.127: T_R52.1@193.608,52.201 193.835,52.427 193.835,52.469 193.909,52.543 199.783,52.543 199.968,52.358 v1(200.044,52.358)
BP_IO.LVDS_N2: T_J4.C4 T_R53.1 | length 82.8
  L4 w0.127: T_R53.1@193.608,47.121 193.835,47.347 193.835,47.389 193.909,47.463 193.968,47.463 194.658,47.463 194.732,47.389 194.732,47.372 194.795,47.309 195.297,47.309 195.359,47.372 195.359,47.389 195.434,47.463 195.985,47.463 199.011,47.463 199.962,46.512 199.962,42.393 202.897,39.458 209.532,39.458 213.151,35.839 213.151,21.154 209.902,17.906 209.768,17.771 ccw(c210.177,17.361) 209.768,16.951 209.816,16.903 cw(c209.586,16.673) 209.816,16.443 209.126,15.752 cw(c208.896,15.982) 208.666,15.752 208.605,15.813 ccw(c208.195,15.404) 207.785,15.813 207.095,15.123 ccw(c207.505,14.713) 207.095,14.304 207.156,14.243 cw(c206.926,14.013) 207.156,13.783 206.466,13.092 cw(c206.236,13.322) 206.006,13.092 205.957,13.141 ccw(c205.547,12.731) 205.138,13.141 204.506,12.509 202.487,10.49 199.126,10.49 198.185,9.549 198.185,6.409 198.493,6.1 198.493,6.065 198.64,5.918 212.356,5.918 212.673,5.601 212.673,5.425 212.198,4.95 T_J4.C4@212.1,4.95
BP_IO.LVDS_N3: T_J4.L4 T_R54.1 | length 82.7
  L4 w0.127: T_R54.1@193.608,42.98 193.835,42.753 193.835,42.711 193.909,42.637 194.384,42.637 194.575,42.637 ccw(c194.575,42.962) 194.9,42.962 194.9,45.596 cw(c195.48,45.596) 195.48,46.175 196.456,46.175 cw(c196.456,45.596) 197.035,45.596 197.035,42.962 ccw(c197.361,42.962) 197.361,42.637 197.902,42.637 198.254,42.286 202.264,38.275 208.463,38.275 211.54,35.198 211.54,21.772 211.044,21.276 210.002,20.234 cw(c209.592,20.644) 209.182,20.235 208.23,21.187 ccw(c208,20.956) 207.77,21.187 207.079,20.496 ccw(c207.309,20.266) 207.079,20.036 208.242,18.873 cw(c207.832,18.464) 208.242,18.054 207.552,17.364 cw(c207.142,17.773) 206.733,17.364 205.57,18.526 ccw(c205.34,18.296) 205.11,18.526 204.419,17.836 ccw(c204.649,17.606) 204.419,17.376 205.582,16.213 cw(c205.172,15.803) 205.582,15.394 204.892,14.703 cw(c204.482,15.113) 204.072,14.703 202.91,15.866 ccw(c202.679,15.636) 202.449,15.866 201.759,15.176 ccw(c201.989,14.946) 201.759,14.716 202.712,13.763 cw(c202.302,13.353) 202.712,12.944 202.577,12.809 201.457,11.689 198.674,11.689 197.069,10.083 197.069,5.249 197.118,5.2 197.163,5.155 197.392,4.925 ccw(c197.482,5.015) 197.572,4.925 197.771,5.124 cw(c197.859,5.035) 197.948,5.124 198.214,4.858 cw(c198.126,4.769) 198.214,4.681 198.015,4.482 ccw(c198.105,4.392) 198.015,4.302 198.21,4.107 198.706,4.107 199.861,4.107 200.073,4.319 200.073,4.424 199.547,4.95 T_J4.L4@199.5,4.95
BP_IO.LVDS_N4: T_J4.I4 T_R55.1 | length 82.8
  L1 w0.127: v1(197.552,38.465) 197.552,38.39 197.366,38.204 197.366,36.944 196.561,36.139 194.602,36.139 193.966,35.502 193.966,34.672 192.857,33.563 192.857,17.906 192.857,16.888 cw(c192.278,16.888) 192.278,16.308 191.497,16.308 ccw(c191.497,15.983) 191.172,15.983 191.172,15.007 ccw(c191.497,15.007) 191.497,14.681 192.421,14.681 cw(c192.421,14.102) 193.001,14.102 193.001,13.126 cw(c192.421,13.126) 192.421,12.546 186.762,12.546 ccw(c186.762,12.221) 186.436,12.221 186.436,11.245 ccw(c186.762,11.245) 186.762,10.919 192.278,10.919 cw(c192.278,10.34) 192.857,10.34 192.857,10.149 192.857,8.777 197.561,4.072 204.059,4.072 204.273,4.287 204.273,4.618 203.941,4.95 T_J4.I4@203.7,4.95
  L4 w0.127: T_R55.1@193.608,39.501 193.835,39.727 193.835,39.769 193.909,39.843 198.156,39.843 201.543,36.456 202.256,36.456 202.596,36.115 202.596,35.382 202.276,35.062 200.957,35.062 200.793,35.062 200.432,35.423 cw(c200.522,35.513) 200.432,35.602 200.651,35.821 ccw(c200.562,35.91) 200.651,35.998 200.385,36.264 ccw(c200.296,36.176) 200.208,36.264 199.988,36.045 cw(c199.899,36.133) 199.811,36.045 199.545,36.311 cw(c199.633,36.399) 199.545,36.488 199.764,36.708 ccw(c199.676,36.796) 199.764,36.885 199.498,37.151 ccw(c199.41,37.062) 199.321,37.151 199.102,36.933 cw(c199.013,37.022) 198.923,36.933 198.667,37.188 198.576,37.188 197.75,37.188 197.366,37.572 197.366,38.204 197.552,38.39 v1(197.552,38.465)
BP_IO.LVDS_N5: T_J4.K5 T_R56.1 | length 82.8
  L1 w0.127: v1(197.579,34.311) 197.579,34.236 197.765,34.05 197.765,33.081 197.765,32.891 ccw(c198.344,32.891) 198.344,32.311 201.227,32.311 cw(c201.227,31.986) 201.552,31.986 201.552,31.01 cw(c201.227,31.01) 201.227,30.684 197.946,30.684 ccw(c197.946,30.105) 197.366,30.105 197.366,29.129 ccw(c197.946,29.129) 197.946,28.549 201.227,28.549 cw(c201.227,28.224) 201.552,28.224 201.552,27.248 cw(c201.227,27.248) 201.227,26.922 197.946,26.922 ccw(c197.946,26.343) 197.366,26.343 197.366,25.367 ccw(c197.946,25.367) 197.946,24.787 201.227,24.787 cw(c201.227,24.462) 201.552,24.462 201.552,23.486 cw(c201.227,23.486) 201.227,23.16 197.946,23.16 ccw(c197.946,22.581) 197.366,22.581 197.366,21.605 ccw(c197.946,21.605) 197.946,21.025 201.227,21.025 cw(c201.227,20.7) 201.552,20.7 201.552,19.724 cw(c201.227,19.724) 201.227,19.398 197.946,19.398 ccw(c197.946,18.819) 197.366,18.819 197.366,17.843 ccw(c197.946,17.843) 197.946,17.263 201.227,17.263 cw(c201.227,16.938) 201.552,16.938 201.552,15.962 cw(c201.227,15.962) 201.227,15.636 197.946,15.636 ccw(c197.946,15.057) 197.366,15.057 197.366,14.081 ccw(c197.946,14.081) 197.946,13.501 201.227,13.501 cw(c201.227,13.176) 201.552,13.176 201.552,12.2 cw(c201.227,12.2) 201.227,11.874 198.344,11.874 ccw(c198.344,11.295) 197.765,11.295 197.765,10.049 197.765,8.485 198.422,7.828 201.159,7.828 201.373,7.613 201.373,7.282 201.041,6.95 T_J4.K5@200.8,6.95
  L4 w0.127: T_R56.1@193.608,36.961 193.835,37.187 193.835,37.229 193.909,37.303 194.037,37.303 194.627,37.303 cw(c194.627,37.176) 194.754,37.176 194.754,36.894 ccw(c194.86,36.894) 194.86,36.789 195.176,36.789 ccw(c195.176,36.894) 195.281,36.894 195.281,37.176 cw(c195.408,37.176) 195.408,37.303 195.841,37.303 197.765,35.379 197.765,34.572 197.579,34.387 v1(197.579,34.311)
BP_IO.LVDS_N6: T_J4.H5 T_R57.1 | length 82.9
  L1 w0.127: v1(195.851,34.566) 195.851,34.49 195.666,34.305 195.666,33.631 195.524,33.489 195.111,33.077 ccw(c195.341,32.846) 195.341,32.521 195.999,32.521 cw(c195.999,31.942) 196.579,31.942 196.579,30.965 cw(c195.999,30.965) 195.999,30.386 194.537,30.386 ccw(c194.537,30.061) 194.212,30.061 194.212,29.084 ccw(c194.537,29.084) 194.537,28.759 195.999,28.759 cw(c195.999,28.18) 196.579,28.18 196.579,27.203 cw(c195.999,27.203) 195.999,26.624 194.537,26.624 ccw(c194.537,26.299) 194.212,26.299 194.212,25.322 ccw(c194.537,25.322) 194.537,24.997 195.999,24.997 cw(c195.999,24.418) 196.579,24.418 196.579,23.441 cw(c195.999,23.441) 195.999,22.862 194.537,22.862 ccw(c194.537,22.537) 194.212,22.537 194.212,21.56 ccw(c194.537,21.56) 194.537,21.235 195.999,21.235 cw(c195.999,20.656) 196.579,20.656 196.579,19.679 cw(c195.999,19.679) 195.999,19.1 194.537,19.1 ccw(c194.537,18.775) 194.212,18.775 194.212,17.798 ccw(c194.537,17.798) 194.537,17.473 195.999,17.473 cw(c195.999,16.894) 196.579,16.894 196.579,15.917 cw(c195.999,15.917) 195.999,15.338 194.537,15.338 ccw(c194.537,15.013) 194.212,15.013 194.212,14.036 ccw(c194.537,14.036) 194.537,13.711 195.999,13.711 cw(c195.999,13.132) 196.579,13.132 196.579,12.155 cw(c195.999,12.155) 195.999,11.576 194.955,11.576 ccw(c194.955,11.251) 194.629,11.251 194.629,10.139 194.629,9.344 194.992,8.982 195.037,8.937 195.424,8.55 ccw(c195.514,8.64) 195.604,8.55 195.731,8.677 cw(c195.82,8.589) 195.908,8.677 196.174,8.411 cw(c196.086,8.323) 196.174,8.234 196.046,8.105 ccw(c196.134,8.017) 196.046,7.928 196.312,7.662 ccw(c196.4,7.751) 196.489,7.662 196.618,7.791 cw(c196.706,7.702) 196.795,7.791 197.061,7.525 cw(c196.972,7.436) 197.061,7.347 196.934,7.22 ccw(c197.023,7.13) 196.934,7.04 197.377,6.597 197.422,6.552 197.902,6.072 205.359,6.072 205.573,6.287 205.573,6.618 205.241,6.95 T_J4.H5@205,6.95
  L4 w0.127: T_R57.1@193.608,31.881 193.835,32.107 193.835,32.149 193.909,32.223 194.389,32.223 195.864,30.748 196.919,30.748 198.076,30.748 cw(c198.076,30.443) 198.382,30.443 198.382,29.845 ccw(c198.941,29.845) 198.941,29.285 199.857,29.285 ccw(c199.857,29.845) 200.417,29.845 200.417,30.443 cw(c200.722,30.443) 200.722,30.748 200.912,30.748 201.255,30.748 201.707,31.2 201.707,32.6 201.245,33.062 196.287,33.062 196.099,33.25 196.023,33.326 195.666,33.683 195.666,34.305 195.851,34.49 v1(195.851,34.566)
BP_IO.LVDS_N7: T_J4.F6 T_R58.1 | length 82.7
  L1 w0.127: v1(206.317,24.464) 206.393,24.464 206.578,24.649 207.553,24.649 208.156,25.253 208.156,25.529 208.156,26.387 cw(c208.482,26.387) 208.482,26.713 209.428,26.713 ccw(c209.428,27.292) 210.008,27.292 210.008,28.268 ccw(c209.428,28.268) 209.428,28.848 208.482,28.848 cw(c208.482,29.173) 208.156,29.173 208.156,29.364 208.156,30.092 208.739,30.674 210.414,30.674 210.991,30.097 210.991,23.854 210.991,22.941 cw(c210.665,22.941) 210.665,22.616 206.276,22.616 ccw(c206.276,22.036) 205.696,22.036 205.696,21.06 ccw(c206.276,21.06) 206.276,20.481 210.882,20.481 cw(c210.882,20.155) 211.207,20.155 211.207,19.179 cw(c210.882,19.179) 210.882,18.854 206.276,18.854 ccw(c206.276,18.274) 205.696,18.274 205.696,17.298 ccw(c206.276,17.298) 206.276,16.719 210.882,16.719 cw(c210.882,16.393) 211.207,16.393 211.207,15.417 cw(c210.882,15.417) 210.882,15.092 206.276,15.092 ccw(c206.276,14.512) 205.696,14.512 205.696,13.536 ccw(c206.276,13.536) 206.276,12.957 210.665,12.957 cw(c210.665,12.631) 210.991,12.631 210.991,12.441 210.991,11.33 210.571,10.91 209.025,10.91 208.473,10.359 208.473,9.523 T_J4.F6@207.9,8.95
  L4 w0.127: T_R58.1@193.608,29.341 193.835,29.567 193.835,29.609 193.909,29.683 194.028,29.683 194.618,29.683 cw(c194.618,29.556) 194.745,29.556 194.745,29.286 ccw(c194.851,29.286) 194.851,29.181 195.167,29.181 ccw(c195.167,29.286) 195.272,29.286 195.272,29.556 cw(c195.399,29.556) 195.399,29.683 195.768,29.683 200.801,24.649 206.056,24.649 206.242,24.464 v1(206.317,24.464)
BP_IO.LVDS_N8: T_J4.C6 T_R59.1 | length 82.8
  L1 w0.127: v1(181.219,60.537) 181.295,60.537 181.48,60.723 185.394,60.723 185.395,60.721 192.261,60.721 198.314,54.669 198.314,51.624 200.092,49.846 200.092,42.164 203.315,38.941 204.613,38.941 205.912,37.642 206.01,37.545 206.046,37.508 ccw(c206.456,37.917) 206.866,37.508 206.919,37.561 cw(c207.149,37.331) 207.38,37.561 208.07,36.871 cw(c207.84,36.64) 208.07,36.41 ; 208.069,36.41 208.005,36.345 ccw(c208.415,35.936) 208.006,35.525 208.694,34.836 ccw(c209.105,35.245) 209.474,34.799 209.477,34.799 209.58,34.901 cw(c209.81,34.671) 210.04,34.901 210.73,34.21 cw(c210.5,33.98) 210.73,33.75 ; 210.729,33.75 210.677,33.697 ccw(c211.086,33.287) 210.677,32.877 211.164,32.39 211.262,32.293 212.673,30.881 212.673,9.523 T_J4.C6@212.1,8.95
  L4 w0.127: T_R59.1@178.608,54.741 178.835,54.967 178.835,55.009 178.909,55.083 179.318,55.083 179.821,55.586 179.821,57.83 179.821,58.521 179.895,58.595 179.897,58.595 179.959,58.658 179.959,59.159 179.897,59.222 179.895,59.222 179.821,59.296 179.821,59.865 179.821,60.285 180.258,60.723 180.958,60.723 181.144,60.537 v1(181.219,60.537)
BP_IO.LVDS_N9: T_J4.L6 T_R60.1 | length 86.5
  L1 w0.127: v1(179.151,53.1) 179.205,53.047 179.467,53.047 179.969,52.545 182.607,52.545 182.798,52.545 ccw(c182.798,53.125) 183.377,53.125 183.377,53.635 cw(c183.703,53.635) 183.703,53.961 184.679,53.961 cw(c184.679,53.635) 185.004,53.635 185.004,51.681 ccw(c185.584,51.681) 185.584,51.101 186.56,51.101 ccw(c186.56,51.681) 187.139,51.681 187.139,52.22 cw(c187.465,52.22) 187.465,52.545 188.202,52.545 192.016,52.545 195.95,48.611 196.668,47.894 cw(c196.437,47.664) 196.437,47.338 194.121,47.338 ccw(c194.121,46.759) 193.541,46.759 193.541,45.783 ccw(c194.121,45.783) 194.121,45.203 197.009,45.203 cw(c197.009,44.878) 197.335,44.878 197.335,43.902 cw(c197.009,43.902) 197.009,43.576 194.121,43.576 ccw(c194.121,42.997) 193.541,42.997 193.541,42.021 ccw(c194.121,42.021) 194.121,41.441 196.711,41.441 cw(c196.711,41.116) 197.037,41.116 197.037,40.925 202.595,35.367 202.595,10.496 202.181,10.082 200.436,10.082 200.073,9.719 200.073,9.282 199.741,8.95 T_J4.L6@199.5,8.95
  L4 w0.127: T_R60.1@178.608,50.6 178.835,50.373 178.835,50.331 178.909,50.257 179.508,50.257 179.876,50.625 179.876,50.978 179.876,51.042 ccw(c179.749,51.042) 179.749,51.169 179.27,51.169 cw(c179.27,51.294) 179.145,51.294 179.145,51.67 cw(c179.27,51.67) 179.27,51.796 179.749,51.796 ccw(c179.749,51.923) 179.876,51.923 179.876,52.268 179.876,52.638 179.666,52.848 179.467,53.047 179.205,53.047 v1(179.151,53.1)
BP_IO.LVDS_N10: T_J4.I6 T_R61.1 | length 82.9
  L1 w0.127: v1(181.624,57.169) 181.624,57.244 181.438,57.43 181.438,58.243 181.745,58.55 181.867,58.672 182.435,58.672 182.53,58.578 182.53,58.573 182.624,58.479 183.062,58.479 183.157,58.573 183.157,58.578 183.251,58.672 183.486,58.672 184.172,58.672 184.981,58.672 cw(c184.981,58.347) 185.306,58.347 185.306,57.565 ccw(c185.885,57.565) 185.885,56.986 186.862,56.986 ccw(c186.862,57.565) 187.441,57.565 187.441,58.347 cw(c187.766,58.347) 187.766,58.672 187.957,58.672 191.307,58.672 193.359,56.621 193.359,53.972 198.472,48.86 198.472,41.287 204.273,35.485 204.273,33.337 204.273,33.146 ccw(c204.852,33.146) 204.852,32.567 205.16,32.567 cw(c205.16,32.242) 205.485,32.242 205.485,31.265 cw(c205.16,31.265) 205.16,30.94 204.852,30.94 ccw(c204.852,30.361) 204.273,30.361 204.273,29.436 204.273,9.523 T_J4.I6@203.7,8.95
  L4 w0.127: T_R61.1@178.608,47.121 178.835,47.347 178.835,47.389 178.909,47.463 179.97,47.463 181.438,48.931 181.438,56.908 181.624,57.094 v1(181.624,57.169)
BP_IO.LVDS_N11: T_J5.E1 T_R62.1 | length 86.5
  L1 w0.127: v1(186.63,71.609) 186.683,71.663 186.945,71.663 187.961,72.678 189.602,72.678 191.674,72.678 cw(c191.674,72.099) 192.253,72.099 192.253,69.381 ccw(c192.579,69.381) 192.579,69.056 193.555,69.056 ccw(c193.555,69.381) 193.88,69.381 193.88,72.109 cw(c194.46,72.109) 194.46,72.689 195.436,72.689 cw(c195.436,72.109) 196.015,72.109 196.015,69.381 ccw(c196.341,69.381) 196.341,69.056 197.317,69.056 ccw(c197.317,69.381) 197.642,69.381 197.642,72.109 cw(c198.222,72.109) 198.222,72.689 199.198,72.689 cw(c199.198,72.109) 199.777,72.109 199.777,69.381 ccw(c200.103,69.381) 200.103,69.056 201.079,69.056 ccw(c201.079,69.381) 201.404,69.381 201.404,72.109 cw(c201.984,72.109) 201.984,72.689 202.96,72.689 cw(c202.96,72.109) 203.539,72.109 203.539,69.381 ccw(c203.865,69.381) 203.865,69.056 204.841,69.056 ccw(c204.841,69.381) 205.166,69.381 205.166,72.099 cw(c205.746,72.099) 205.746,72.678 206.391,72.678 208.371,72.678 209.773,74.08 209.773,75.377 T_J5.E1@209.2,75.95
  L4 w0.127: T_R62.1@178.608,42.98 178.835,42.753 178.835,42.711 178.909,42.637 180.115,42.637 181.089,43.611 181.134,43.656 ccw(c181.044,43.746) 181.134,43.836 180.918,44.051 cw(c181.007,44.14) 180.918,44.229 181.184,44.495 cw(c181.273,44.406) 181.362,44.495 181.578,44.279 ccw(c181.667,44.369) 181.757,44.279 182.225,44.746 182.639,45.161 182.639,67.356 186.576,71.294 186.576,71.556 v1(186.63,71.609)
BP_IO.LVDS_N12: T_J5.B1 T_R63.1 | length 82.9
  L4 w0.127: T_R63.1@178.608,39.501 178.835,39.727 178.835,39.769 178.909,39.843 180.11,39.843 184.459,44.193 184.459,58.962 186.925,61.427 196.932,61.427 197.33,61.826 197.844,62.34 197.844,62.869 cw(c198.17,62.869) 198.17,63.194 198.365,63.194 ccw(c198.365,63.774) 198.944,63.774 198.944,64.75 ccw(c198.365,64.75) 198.365,65.329 195.702,65.329 cw(c195.702,65.655) 195.377,65.655 195.377,66.631 cw(c195.702,66.631) 195.702,66.956 198.365,66.956 ccw(c198.365,67.536) 198.944,67.536 198.944,68.512 ccw(c198.365,68.512) 198.365,69.091 195.702,69.091 cw(c195.702,69.417) 195.377,69.417 195.377,70.393 cw(c195.702,70.393) 195.702,70.718 198.365,70.718 ccw(c198.365,71.298) 198.944,71.298 198.944,72.274 ccw(c198.365,72.274) 198.365,72.853 198.17,72.853 cw(c198.17,73.179) 197.844,73.179 197.844,73.369 197.844,74.236 197.844,74.926 197.919,75.001 197.936,75.001 197.998,75.063 197.998,75.565 197.936,75.628 197.919,75.628 197.844,75.702 197.844,75.938 198.006,76.101 198.739,76.833 213.74,76.833 213.973,76.6 213.973,76.303 213.62,75.95 T_J5.B1@213.4,75.95
BP_IO.LVDS_N13: T_J5.K1 T_R64.1 | length 86.5
  L4 w0.127: T_R64.1@178.608,35.34 178.835,35.113 178.835,35.091 178.909,35.017 179.258,35.017 179.43,35.017 179.479,35.066 ccw(c179.389,35.156) 179.479,35.245 179.293,35.431 cw(c179.382,35.519) 179.293,35.608 179.559,35.874 cw(c179.648,35.786) 179.736,35.874 179.922,35.689 ccw(c180.012,35.779) 180.101,35.689 180.144,35.731 180.144,35.93 180.144,37.571 185.748,43.175 185.748,57.948 187.82,60.02 200.329,60.02 201.373,61.064 201.373,61.632 201.373,62.6 cw(c201.952,62.6) 201.952,63.18 205.22,63.18 ccw(c205.22,63.505) 205.546,63.505 205.546,64.481 ccw(c205.22,64.481) 205.22,64.807 200.852,64.807 cw(c200.852,65.386) 200.273,65.386 200.273,66.362 cw(c200.852,66.362) 200.852,66.942 205.22,66.942 ccw(c205.22,67.267) 205.546,67.267 205.546,68.243 ccw(c205.22,68.243) 205.22,68.569 200.852,68.569 cw(c200.852,69.148) 200.273,69.148 200.273,70.124 cw(c200.852,70.124) 200.852,70.704 205.22,70.704 ccw(c205.22,71.029) 205.546,71.029 205.546,72.005 ccw(c205.22,72.005) 205.22,72.331 201.952,72.331 cw(c201.952,72.91) 201.373,72.91 201.373,73.101 201.373,75.377 T_J5.K1@200.8,75.95
BP_IO.LVDS_N14: T_J5.H1 T_R65.1 | length 82.9
  L1 w0.127: v1(203.531,74.377) 203.606,74.377 203.792,74.191 204.197,74.191 204.198,74.19 205.01,74.19 205.573,74.753 205.573,75.377 T_J5.H1@205,75.95